# EAGLE board hideo (EAGLE 4.16)
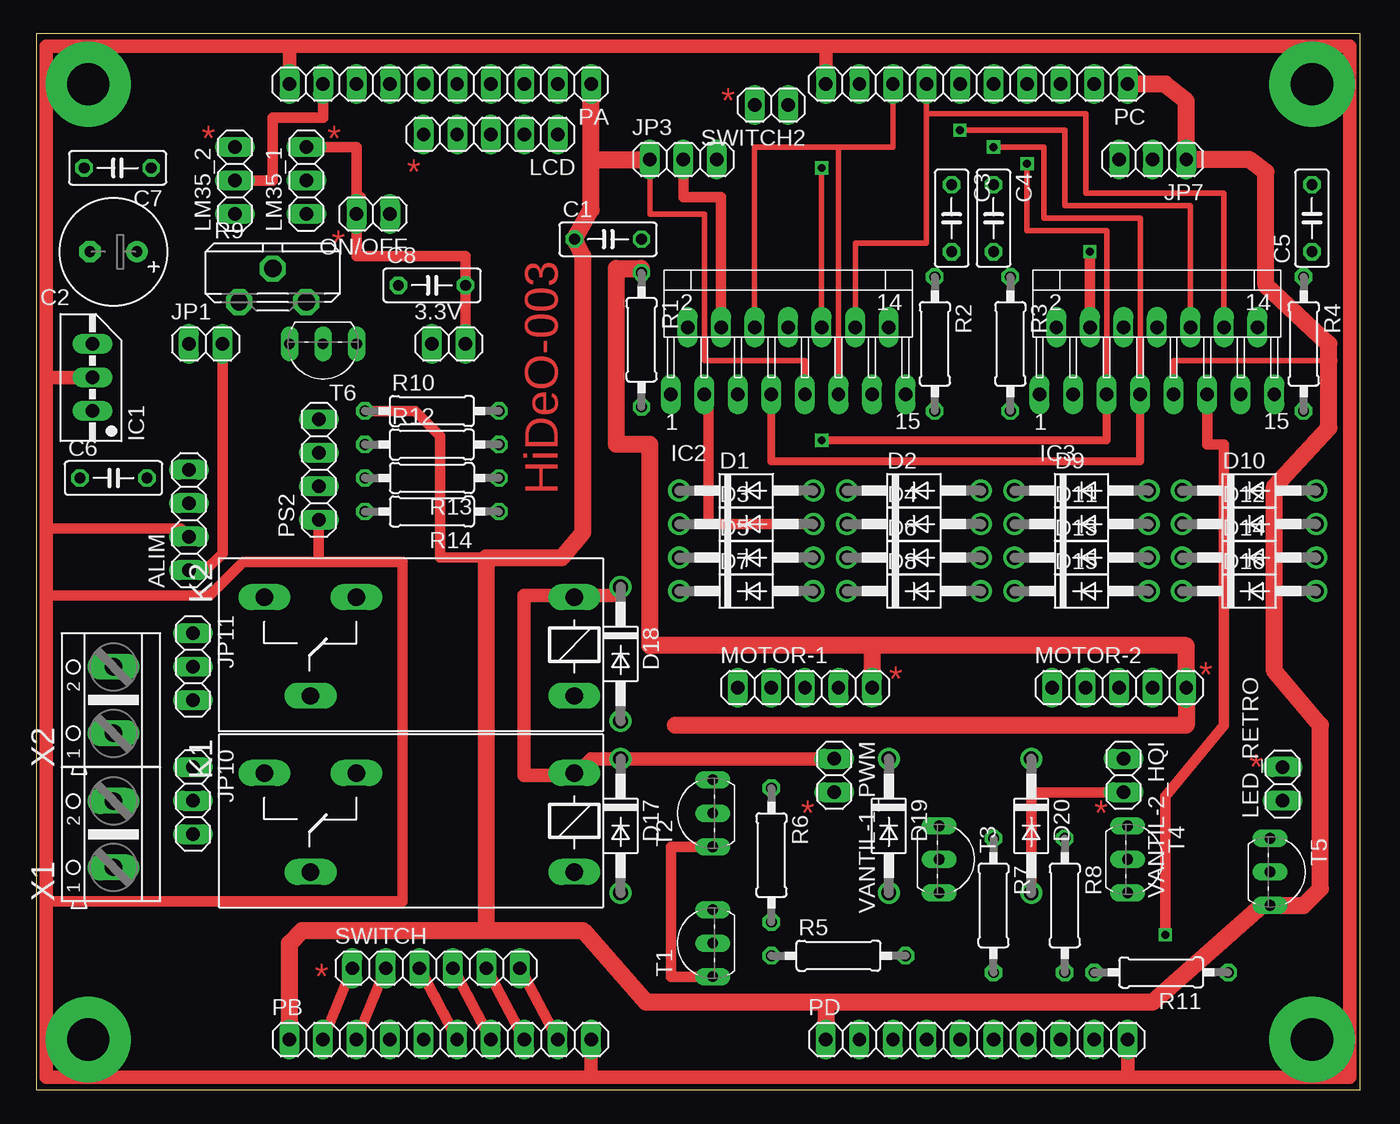
[diagram p0: board, top side]
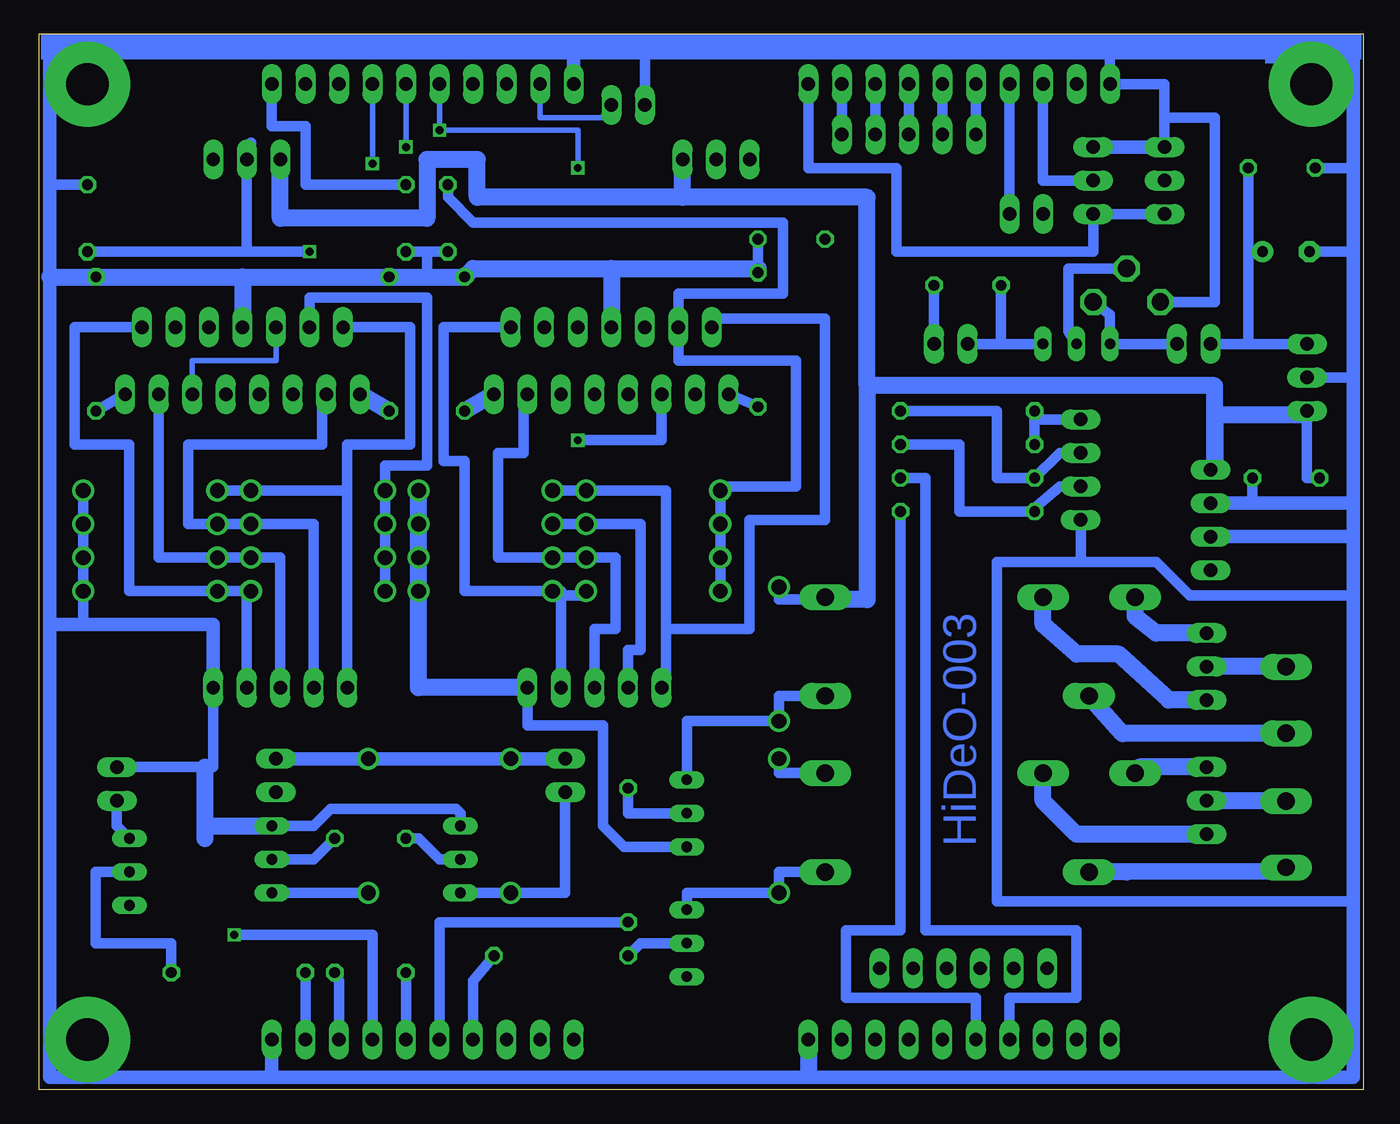
[diagram p1: board, bottom side, seen from below]

Size 100.32 x 80 mm. Coordinates in mm from the lower left corner, seen from the top.
Outline: 0,0 100.32,0 100.32,80 0,80 0,0
Copper layers (1*16): Top 0.035mm / dielectric 1.5mm / Bottom 0.035mm
Design rules "default": minimum track width 10mil, minimum drill 24mil, track to track 8mil, track to pad 8mil, pad to pad 8mil, via to via 8mil, smd to smd 8mil, copper to edge 40mil, drill to drill 8mil, minimum pad ring 10mil, minimum via ring 8mil, stop-mask expansion 4mil, vias tented up to drill 0mil, thermal gap 10mil

## Footprints (pad centres in the part's own frame; a part is rotated, then mirrored left to right if it is on the bottom)
1X02 = drill 1.016 long: 1 -1.27,0; 2 1.27,0
1X04 = drill 1.016 long: 1 -3.81,0; 2 -1.27,0; 3 1.27,0; 4 3.81,0
C050-025X075 = drill 0.813 octagon: 1 -2.54,0; 2 2.54,0
E3,5-8 = drill 0.813 pad 1.6 round: + -1.778,0 | drill 0.813 pad 1.6 octagon: - 1.778,0
DO41-10 = drill 1.118 round: A 5.08,0; C -5.08,0
78MXXS = drill 1.016 long: GND 0,-2.54; IN -2.54,-2.54; OUT 2.54,-2.54
MW-15 = drill 1.016 pad 1.27 long: 1 -8.89,-5.08; 2 -7.62,0; 3 -6.35,-5.08; 4 -5.08,0; 5 -3.81,-5.08; 6 -2.54,0; 7 -1.27,-5.08; 8 0,0; 9 1.27,-5.08; 10 2.54,0; 11 3.81,-5.08; 12 5.08,0; 13 6.35,-5.08; 14 7.62,0; 15 8.89,-5.08
1X03 = drill 1.016 long: 1 -2.54,0; 2 0,0; 3 2.54,0
G2R = drill 1.321 long: 1 -2.54,-3.683; 2 -2.54,3.81; O 13.97,-3.683; P 17.45,3.81; S 20.955,-3.683
1X05 = drill 1.016 long: 1 -5.08,0; 2 -2.54,0; 3 0,0; 4 2.54,0; 5 5.08,0
1X10 = drill 1.016 long: 1 -11.43,0; 2 -8.89,0; 3 -6.35,0; 4 -3.81,0; 5 -1.27,0; 6 1.27,0; 7 3.81,0; 8 6.35,0; 9 8.89,0; 10 11.43,0
0207/10 = drill 0.813 octagon: 1 -5.08,0; 2 5.08,0
ST10 = drill 1.321 octagon: A -2.54,-1.27; E 2.54,-1.27; S 0,1.27
1X06 = drill 1.016 long: 1 -6.35,0; 2 -3.81,0; 3 -1.27,0; 4 1.27,0; 5 3.81,0; 6 6.35,0
TO92-CBE = drill 0.813 long: B 0,0; C 2.54,0; E -2.54,0
AK500/2 = drill 1.321 long: 1 -2.515,0; 2 2.515,0

## Placement (x,y rotation side)
3.3V  [1X02]  31.27,56.51 0 top
ALIM  [1X04]  11.58,43.17 90 top
C1  [C050-025X075]  43.33,64.45 0 top
C2  [E3,5-8]  5.87,63.49 180 top
C3  [C050-025X075]  69.37,66.04 270 top
C4  [C050-025X075]  72.54,66.04 270 top
C5  [C050-025X075]  96.67,66.04 90 top
C6  [C050-025X075]  5.87,46.35 0 top
C7  [C050-025X075]  6.18,69.84 180 top
C8  [C050-025X075]  30,60.95 0 top
D1  1N4004  [DO41-10]  53.81,45.4 0 top
D2  1N4004  [DO41-10]  66.51,45.4 0 top
D3  1N4004  [DO41-10]  53.81,42.86 0 top
D4  1N4004  [DO41-10]  66.51,42.86 0 top
D5  1N4004  [DO41-10]  53.81,40.32 0 top
D6  1N4004  [DO41-10]  66.51,40.32 0 top
D7  1N4004  [DO41-10]  53.81,37.78 0 top
D8  1N4004  [DO41-10]  66.51,37.78 0 top
D9  1N4004  [DO41-10]  79.21,45.4 0 top
D10  1N4004  [DO41-10]  91.91,45.4 0 top
D11  1N4004  [DO41-10]  79.21,42.86 0 top
D12  1N4004  [DO41-10]  91.91,42.86 0 top
D13  1N4004  [DO41-10]  79.21,40.32 0 top
D14  1N4004  [DO41-10]  91.91,40.32 0 top
D15  1N4004  [DO41-10]  79.21,37.78 0 top
D16  1N4004  [DO41-10]  91.91,37.78 0 top
D17  1N4004  [DO41-10]  44.29,20 270 top
D18  1N4004  [DO41-10]  44.29,33.02 270 top
D19  1N4004  [DO41-10]  64.61,20 270 top
D20  1N4004  [DO41-10]  75.4,20 270 top
IC1  [78MXXS]  1.74,53.97 90 top
IC2  [MW-15]  56.99,57.78 0 top
IC3  [MW-15]  84.92,57.78 0 top
JP1  [1X02]  12.85,56.51 0 top
JP3  [1X03]  49.05,70.48 0 top
JP7  [1X03]  84.61,70.48 180 top
JP10  [1X03]  11.9,21.9 270 top
JP11  [1X03]  11.9,32.06 270 top
K1  G2R  [G2R]  38.25,20.32 180 top
K2  G2R  [G2R]  38.25,33.65 180 top
LCD  [1X05]  34.44,72.39 180 top
LED_RETRO  [1X02]  94.45,23.17 90 top
LM35_1  [1X03]  20.47,68.89 90 top
LM35_2  [1X03]  15.07,68.89 90 top
MOTOR-1  [1X05]  58.26,30.48 0 top
MOTOR-2  [1X05]  82.07,30.48 0 top
ON/OFF  [1X02]  25.55,66.35 180 top
PA  [1X10]  30.63,76.2 180 top
PB  [1X10]  30.63,3.81 0 top
PC  [1X10]  71.27,76.2 180 top
PD  [1X10]  71.27,3.81 0 top
PS2  [1X04]  21.43,46.98 90 top
R1  1  [0207/10]  45.87,56.83 270 top
R2  1  [0207/10]  68.1,56.51 270 top
R3  1  [0207/10]  73.81,56.51 270 top
R4  1  [0207/10]  96.04,56.51 270 top
R5  5K6  [0207/10]  60.8,10.15 0 top
R6  5K6  [0207/10]  55.72,17.78 270 top
R7  [0207/10]  72.54,13.96 270 top
R8  [0207/10]  77.94,13.96 270 top
R9  [ST10]  17.93,60.95 0 top
R10  10k  [0207/10]  30,51.43 0 top
R11  [0207/10]  85.24,8.88 180 top
R12  10k  [0207/10]  30,48.89 0 top
R13  150  [0207/10]  30,46.35 180 top
R14  150  [0207/10]  30,43.81 180 top
SWITCH  [1X06]  30.32,9.2 0 top
SWITCH2  [1X02]  55.72,74.61 180 top
T1  [TO92-CBE]  51.27,11.11 90 top
T2  [TO92-CBE]  51.27,20.95 90 top
T3  [TO92-CBE]  68.42,17.46 270 top
T4  [TO92-CBE]  82.7,17.46 270 top
T5  [TO92-CBE]  93.5,16.51 270 top
T6  [TO92-CBE]  21.74,56.51 180 top
VANTIL-1_PWM  [1X02]  60.48,23.81 270 top
VANTIL-2_HQI  [1X02]  82.39,23.81 270 top
X1  [AK500/2]  5.87,19.36 90 top
X2  [AK500/2]  5.87,29.52 90 top

## Library data of the parts
3.3V ALIM JP1 JP3 JP7 JP10 JP11 LCD LED_RETRO LM35_1 LM35_2 MOTOR-1 MOTOR-2 ON/OFF PA PB PC PD PS2 SWITCH SWITCH2 VANTIL-1_PWM VANTIL-2_HQI = pinhead
C1-C8 R1-R8 R10-R14 = rcl
D1-D20 = diode
IC1 = v-reg
IC2 IC3 = sgs-thom
K1 K2 = relay
R9 = pot
T1-T6 = transistor
X1 X2 = con-ptr500

## Nets
+5V: ALIM.1 JP1.2 R9.E T6.C
GND: 3.3V.2 ALIM.2 ALIM.3 C1.2 C2.- C3.2 C4.2 C5.2 C6.2 C7.2 C8.2 D2.A D4.A D6.A D8.A D10.A D12.A D14.A D16.A IC1.GND IC2.8 IC3.8 LED_RETRO.2 LM35_1.3 LM35_2.3 MOTOR-1.5 MOTOR-2.5 ON/OFF.2 PA.10 PB.10 PC.10 PD.10 PS2.1 R1.1 R2.1 R3.1 R4.1 R9.A SWITCH2.2 T1.E T2.E T3.E T4.E
N$1: C2.+ C7.1 IC1.OUT JP1.1
N$2: D17.A K1.2 T1.C
N$3: R5.1 T1.B
N$6: D1.A D2.C IC2.2 MOTOR-1.1
N$7: D3.A D4.C IC2.3 MOTOR-1.2
N$8: D5.A D6.C IC2.13 MOTOR-1.3
N$9: D7.A D8.C IC2.14 MOTOR-1.4
N$10: JP10.3 K1.O
N$11: JP10.1 K1.S
N$12: IC2.1 R1.2
N$13: IC2.15 R2.2
N$15: JP10.2 X1.2
N$17: R9.S T6.B
N$18: 3.3V.1 C8.1 T6.E
N$20: C3.1 D1.C D3.C D5.C D7.C IC2.4 JP3.2
N$21: K1.P X1.1
N$22: D18.A K2.2 T2.C
N$23: R6.1 T2.B
N$24: D9.A D10.C IC3.2 MOTOR-2.1
N$25: D11.A D12.C IC3.3 MOTOR-2.2
N$26: D13.A D14.C IC3.13 MOTOR-2.3
N$27: D15.A D16.C IC3.14 MOTOR-2.4
N$28: IC3.1 R3.2
N$29: IC3.15 R4.2
N$30: R11.1 T5.B
N$31: PS2.3 R10.2 R13.2
N$32: PS2.2 R12.2 R14.2
N$35: C5.1 D9.C D11.C D13.C D15.C IC3.4 JP7.2
N$36: JP11.3 K2.O
N$37: JP11.1 K2.S
N$38: JP11.2 X2.2
N$39: K2.P X2.1
N$40: LED_RETRO.1 T5.E
N$43: R7.1 T3.B
N$44: D19.A T3.C VANTIL-1_PWM.2
N$48: R8.1 T4.B
N$49: D20.A T4.C VANTIL-2_HQI.2
PA0: LCD.1 PA.2
PA1: LCD.2 PA.3
PA2: LCD.3 PA.4
PA3: LCD.4 PA.5
PA4: LCD.5 PA.6
PA5: ON/OFF.1 PA.7
PA6: LM35_1.2 PA.8
PA7: LM35_2.2 PA.9
PB0: PB.2 SWITCH.1
PB1: PB.3 SWITCH.2
PB2: PB.4 R13.1
PB3: PB.5 R14.1
PB4: PB.6 SWITCH.3
PB5: PB.7 SWITCH.4
PB6: PB.8 SWITCH.5
PB7: PB.9 SWITCH.6
PC2: IC2.5 IC3.5 PC.4
PC3: IC2.7 IC3.7 PC.5
PC4: IC2.10 IC3.10 PC.6
PC5: IC2.12 IC3.12 PC.7
PC6: IC2.6 IC2.11 PC.8
PC7: PC.9 SWITCH2.1
PD2: PD.4 R5.2
PD3: PD.5 R6.2
PD4: PD.6 R7.2
PD5: IC3.6 IC3.11 PD.7
PD6: PD.8 R8.2
PD7: PD.9 R11.2
RXD: PD.2
SCL: PC.2
SDA: PC.3
TXD: PD.3
VCC: C1.1 C4.1 IC2.9 IC3.9 JP3.1 JP7.1 LM35_1.1 LM35_2.1 PA.1 PB.1 PC.1 PD.1 PS2.4 R10.1 R12.1 T5.C
VDD: ALIM.4 C6.1 D17.C D18.C D19.C D20.C IC1.IN JP3.3 JP7.3 K1.1 K2.1 VANTIL-1_PWM.1 VANTIL-2_HQI.1

## Tracks (layer width: path | path; a pad name or v marks a point on that pad's centre or on a via)
+5V
  Top 0.813: 13.8,56.51 JP1.2 14.12,40.63 12.85,39.36 ALIM.1
  Bottom 0.813: R9.E 19.2,58.73 T6.C JP1.2 14.12,57.14
GND
  Top 0.254: T2.E 51.59,18.41
  Top 0.813: ON/OFF.2 24.28,71.43 LM35_1.3 | ON/OFF.2 24.6,67.62 | ON/OFF.2 24.28,63.18 32.54,63.18 3.3V.2 | T1.E 48.1,8.57 48.1,18.41 T2.E | 0.79,14.28 27.77,14.28 27.77,40 21.43,40 | 0.79,42.54 10.95,42.54 ALIM.2 | 0.79,37.46 13.17,37.46 15.71,40 21.43,40 | 21.43,40 PS2.1
  Top 1.016: 19.2,79.05 99.53,79.05 99.53,0.95 82.7,0.95 | 19.2,79.05 0.79,79.05 0.79,53.97 | 0.79,53.97 0.79,42.54 0.79,37.46 0.79,14.28 0.79,0.95 42.06,0.95 | 42.06,0.95 PB.10 | 42.06,0.95 82.7,0.95 | 82.7,0.95 PD.10 | PC.10 59.84,79.05 | 19.2,79.05 PA.10 | 0.79,53.97 IC1.GND
  Top 1.27: 63.33,33.65 87.15,33.65 MOTOR-2.5 87.15,27.62 48.41,27.62 | 63.33,33.65 MOTOR-1.5 | 63.33,33.65 46.51,33.65 46.51,48.89 43.97,48.89 43.97,62.22 45.87,62.22 R1.1
  Bottom 0.813: 96.99,42.54 D14.A D16.A 96.99,35.24 87.15,35.24 | 96.99,45.08 97.31,45.71 | 96.99,45.08 D10.A | 96.99,42.54 D12.A | 96.99,42.54 96.99,45.08 | 19.2,79.05 PA.10 15.07,76.2 LM35_2.3 15.07,73.66 11.27,73.66 11.27,59.68 R9.A | LED_RETRO.2 87.78,24.44 87.15,24.44 MOTOR-2.5 | 8.41,44.45 C6.2 | IC1.GND 0.79,53.97 | 0.79,69.84 C7.2 | 0.79,63.49 C2.- | C1.2 R1.1 45.87,62.22 | 70.95,63.49 C3.2 | 70.95,63.49 C4.2 | 70.95,61.59 70.95,63.49 | 99.53,68.58 C5.2 | 0.79,14.28 27.77,14.28 27.77,40 21.43,40 | MOTOR-1.5 63.33,27.62 57.62,27.62 57.62,20 56.03,18.41 T2.E | T3.E 68.42,20.95 68.73,21.27 78.26,21.27 79.53,20 T4.E | 0.79,37.46 13.17,37.46 15.71,40 21.43,40 | 21.43,40 21.43,42.54 | 3.3V.2 C8.2 | 54.44,79.05 SWITCH2.2
  Bottom 1.016: 59.84,79.05 99.53,79.05 99.53,68.58 99.53,61.59 99.53,35.24 | 59.84,79.05 54.44,79.05 19.2,79.05 0.79,79.05 0.79,69.84 0.79,63.49 0.79,53.97 0.79,44.45 | 99.53,35.24 99.53,0.95 82.7,0.95 | 42.06,0.95 0.79,0.95 0.79,14.28 0.79,37.46 0.79,41.9 | 42.06,0.95 82.7,0.95 | 0.79,41.9 0.79,44.45 | LM35_2.3 LM35_1.3 | 59.84,79.05 PC.10 | PD.10 82.7,0.95 | MOTOR-2.5 87.15,35.24 99.53,35.24 | 42.06,1.27 42.06,0.95 | ALIM.2 0.79,41.9 | 0.79,44.45 8.41,44.45 ALIM.3
  Bottom 1.27: MOTOR-1.5 71.59,30.48 D8.A D6.A D4.A D2.A | 84.92,61.59 IC3.8 | 84.92,61.59 R4.1 99.53,61.59 | 84.92,61.59 R3.1 70.95,61.59 R2.1 67.46,62.22 56.99,62.22 | 56.99,62.22 IC2.8 | 56.99,62.22 45.87,62.22 | 87.78,20 T4.E | 87.78,24.44 87.78,20 | 87.78,20 87.78,19.05 | PB.10 42.06,1.27
N$1
  Bottom 0.813: IC1.OUT 8.72,56.51 | 8.72,56.51 8.72,63.49 | 8.72,63.49 C7.1 | 8.72,63.49 C2.+ | 8.72,56.51 JP1.1
N$2
  Bottom 0.813: K1.2 44.29,16.51 D17.A 51.27,14.92 T1.C
N$3
  Bottom 0.813: R5.1 54.76,11.11 T1.B
N$4  (via drill 3.2 pad 6.45)
  other vias: 96.67,76.2
N$5  (via drill 3.2 pad 6.45)
  other vias: 96.67,3.81
N$6
  Bottom 0.813: MOTOR-1.1 52.86,30.79 52.86,34.92 | 52.86,34.92 46.51,34.92 46.51,43.17 40.79,43.17 40.79,58.41 49.68,58.41 49.68,58.1 IC2.2 | 52.86,34.92 52.86,45.4 D1.A | D1.A 59.21,45.4 | D1.A D2.C
N$7
  Top 0.813: IC2.3 50.95,52.7 50.95,42.86 D3.A
  Bottom 0.813: MOTOR-1.2 55.71,33.33 54.76,33.33 54.76,42.86 D3.A D4.C 61.43,43.17
N$8
  Bottom 0.813: D5.A 56.67,40.32 56.67,34.92 58.25,34.92 MOTOR-1.3 | D5.A D6.C | D5.A 65.56,40.32 65.56,48.25 63.65,48.25 63.65,53.02 IC2.13
N$9
  Bottom 0.813: MOTOR-1.4 60.79,37.78 D8.C | D8.C 61.11,37.78 61.11,37.46 59.21,37.46 59.21,37.78 D7.A | D8.C 68.1,37.78 68.1,47.62 69.68,47.62 69.68,57.78 IC2.14
N$10
  Bottom 1.27: K1.O 24.28,21.9 21.74,19.36 JP10.3
N$11
  Bottom 1.27: K1.S 16.98,24.44 JP10.1
N$12
  Bottom 0.813: R1.2 IC2.1
N$13
  Bottom 1.27: IC2.15 R2.2
N$14  (via drill 3.2 pad 6.45)
  other vias: 3.96,3.81
N$15
  Bottom 1.27: X1.2 5.87,21.9 JP10.2
N$16  (via drill 3.2 pad 6.45)
  other vias: 3.96,76.2
N$17
  Bottom 0.813: T6.B 22.38,57.46 22.38,62.22 R9.S
N$18
  Bottom 0.813: T6.E 27.46,56.51 | 27.46,56.51 3.3V.1 | 27.46,56.51 C8.1
N$20
  Top 0.813: JP3.2 49.05,67.62 51.9,67.62 IC2.4
  Bottom 0.813: D7.C D5.C D3.C D1.C 48.73,45.71 43.01,45.71 43.01,55.24 51.9,55.24 IC2.4 51.9,60.32 43.97,60.32 43.97,65.72 67.46,65.72 69.37,67.62 C3.1
N$21
  Bottom 1.27: K1.P 17.93,16.51 5.89,16.53 X1.1
N$22
  Bottom 0.813: K2.2 44.29,29.84 D18.A 51.27,27.94 T2.C
N$23
  Bottom 0.813: 50.95,20.95 T2.B 55.71,20.95 R6.1
N$24
  Bottom 0.813: MOTOR-2.1 76.99,45.4 | 76.99,45.4 D9.A D10.C | 76.99,45.4 76.99,48.89 72.23,48.89 72.23,57.78 IC3.2
N$25
  Bottom 0.813: MOTOR-2.2 79.53,42.86 D11.A D12.C | D12.C 86.83,43.17 | IC3.3 78.89,52.7 78.89,48.89 89.05,48.89 89.05,42.86 D12.C
N$26
  Bottom 0.813: D14.C D13.A 82.07,40.32 MOTOR-2.3 | D14.C 86.83,40.63 | D14.C 91.28,40.32 IC3.13
N$27
  Bottom 0.813: 84.29,30.48 MOTOR-2.4 84.61,37.78 D15.A D16.C 93.5,37.78 93.5,48.89 97.62,48.89 97.62,57.78 IC3.14
N$28
  Bottom 1.27: R3.2 IC3.1
N$29
  Bottom 0.813: IC3.15 R4.2
N$30
  Bottom 0.813: R11.1 90.32,11.11 96.04,11.11 96.04,16.51 T5.B
N$31
  Bottom 0.813: PS2.3 23.01,48.25 R13.2 27.77,46.35 27.77,51.43 R10.2
N$32
  Bottom 0.813: 25.23,43.81 23.01,45.71 PS2.2 | R12.2 30.63,48.89 30.63,43.81 25.23,43.81 | R14.2 25.23,43.81
N$35  (via drill 0.6)
  Top 0.813: IC3.4 v79.84,63.49
  Bottom 0.813: D15.C D13.C D11.C D9.C 74.13,47.3 70.95,47.3 70.95,60 79.84,60 IC3.4 | 84.61,63.49 C5.1 | JP7.2 84.29,71.75 84.61,71.43 84.61,63.49 | v79.84,63.49 84.61,63.49
N$36
  Bottom 1.27: JP11.3 14.76,29.52 18.57,33.02 21.74,33.02 24.28,35.24 K2.O
N$37
  Bottom 1.27: K2.S 17.3,35.87 15.71,34.6 JP11.1
N$38
  Bottom 1.27: X2.2 5.55,32.06 JP11.2
N$39
  Bottom 1.27: X2.1 11.29,27.01 18.25,26.98 K2.P
N$40
  Bottom 0.813: LED_RETRO.1 94.45,20 T5.E
N$43
  Bottom 0.813: R7.1 71.59,19.05 70,17.46 T3.B
N$44
  Bottom 0.813: VANTIL-1_PWM.2 60.48,14.92 D19.A T3.C
N$48
  Bottom 0.813: T4.B 79.53,17.46 R8.1
N$49
  Top 0.813: VANTIL-2_HQI.2 75.4,22.54 D20.A 75.4,14.6
  Bottom 0.813: T4.C D20.A 75.08,14.92
PA0
  Bottom 0.813: 39.21,75.88 PA.2 LCD.1
PA1
  Bottom 0.813: LCD.2 PA.3
PA2
  Bottom 0.813: LCD.3 PA.4
PA3
  Bottom 0.813: 31.9,73.34 LCD.4 PA.5
PA4
  Bottom 0.813: LCD.5 PA.6
PA5
  Bottom 0.813: ON/OFF.1 PA.7
PA6
  Bottom 0.813: LM35_1.2 24.28,68.89 PA.8
PA7
  Top 0.813: LM35_2.2 17.93,68.89 17.93,73.66 21.74,73.66 PA.9
PB0
  Top 0.813: PB.2 SWITCH.1
PB1
  Top 0.813: PB.3 SWITCH.2
PB2
  Bottom 0.813: PB.4 26.82,6.98 21.74,6.98 21.74,12.06 33.17,12.06 33.17,46.35 R13.1
PB3
  Bottom 0.813: PB.5 29.36,6.98 39.21,6.98 39.21,12.06 35.08,12.06 R14.1
PB4
  Top 0.813: PB.6 SWITCH.3
PB5
  Top 0.813: PB.7 SWITCH.4
PB6
  Top 0.813: PB.8 SWITCH.5
PB7
  Top 0.813: PB.9 SWITCH.6
PC2  (via drill 0.6)
  Top 0.406: IC3.5 81.12,65.08 75.08,65.08 v75.08,70.16
  Top 0.61: IC3.5 81.12,49.21 v59.53,49.21
  Bottom 0.406: v75.08,70.16 PC.4
  Bottom 0.813: v59.53,49.21 53.18,49.21 IC2.5
PC3  (via drill 0.6)
  Top 0.406: IC3.7 83.65,66.04 76.35,66.04 76.35,71.43 v72.54,71.43
  Top 0.61: IC3.7 83.65,47.62 55.71,47.62 IC2.7
  Bottom 0.406: v72.54,71.43 PC.5
PC4  (via drill 0.6)
  Top 0.406: IC2.10 v59.53,69.84 | IC3.10 87.46,66.99 77.94,66.99 77.94,72.7 v70,72.7
  Bottom 0.406: IC2.10 59.84,57.78 59.84,58.1 59.53,58.1 | PC.6 v70,72.7 59.53,72.7 v59.53,69.84
PC5
  Top 0.406: IC2.12 62.07,64.13 67.46,64.13 67.46,73.97 | 67.46,73.97 PC.7 | IC3.12 90.01,67.94 79.53,67.94 79.53,73.97 67.46,73.97
PC6
  Top 0.406: 60.79,71.43 IC2.11 | IC2.6 54.44,71.43 60.79,71.43 | 60.79,71.43 64.92,71.43 PC.8
PC7
  Bottom 0.406: SWITCH2.1 56.99,73.66 62.38,73.66 PC.9
PD2
  Bottom 0.813: R5.2 67.46,8.25 PD.4
PD3
  Bottom 0.813: PD.5 70,12.69 R6.2
PD4
  Bottom 0.813: PD.6 R7.2
PD5  (via drill 0.6)
  Top 0.813: IC3.11 88.73,48.89 90.01,48.89 90.01,27.62 85.56,22.22 v85.56,11.74
  Bottom 0.406: IC3.11 88.73,55.24 82.39,55.24 IC3.6
  Bottom 0.813: v85.56,11.74 75.08,11.74 PD.7
PD6
  Bottom 0.813: PD.8 77.62,8.25 R8.2
PD7
  Bottom 0.813: PD.9 R11.2
VCC
  Top 0.406: IC2.9 58.25,55.24 50.64,55.24 50.64,66.35 46.51,66.35 JP3.1 | IC3.9 86.2,55.24 97.94,55.24
  Top 0.813: R10.1 28.73,51.43 30.63,49.52 30.63,40.32 34.12,40.32
  Top 1.016: JP7.1 87.15,71.43
  Top 1.27: 19.2,5.39 PB.1 19.2,11.11 20.16,12.06 34.12,12.06 | 59.84,6.66 PD.1 | 42.06,70.48 42.06,66.67 C1.1 41.43,63.18 41.43,42.22 39.84,40.32 34.12,40.32 34.12,12.06 | 42.06,70.48 PA.1 | 59.84,6.66 84.61,6.66 92.86,13.96 T5.C 96.04,13.96 97.31,15.23 97.31,27.62 93.81,31.75 93.81,45.71 97.94,50.16 97.94,55.24 97.94,56.51 93.18,60.95 93.18,69.53 91.91,70.48 JP7.1 87.15,74.93 85.56,76.2 PC.1 | 42.06,70.48 JP3.1 | 34.12,12.06 41.43,12.06 46.19,6.66 59.84,6.66
  Bottom 0.813: PA.1 42.06,69.84 35.39,69.84 35.39,63.49 20.47,63.49 LM35_1.1 LM35_2.1 | C4.1 80.16,68.58 80.16,73.02 82.7,73.02 PC.1 | 24.92,50.79 R12.1 | R10.1 24.92,50.79 | 24.92,50.79 PS2.4
VDD
  Top 1.016: D17.C 43.97,25.08 | D17.C VANTIL-1_PWM.1 | 40.79,23.81 K1.1 | D17.C 42.06,25.08 40.79,23.81 | 40.79,23.81 36.98,23.81 36.98,37.46 40.79,37.46 K2.1 | 41.11,37.46 43.65,37.46 D18.C
  Bottom 0.813: D18.C 44.29,37.14 40.47,37.14 | K1.1 44.29,24 D17.C | C6.1 4.28,46.35 IC1.IN 4.28,51.11
  Bottom 1.016: VANTIL-1_PWM.1 D19.C D20.C | D20.C 75.72,25.08 | D20.C VANTIL-2_HQI.1
  Bottom 1.27: 11.27,46.98 ALIM.4 | 11.27,46.98 11.27,53.34 37.62,53.34 | 37.62,53.34 37.62,37.14 40.47,37.14 40.79,37.14 K2.1 | 11.27,46.98 11.27,51.11 4.28,51.11 | 37.62,53.34 37.62,67.62 51.59,67.62 | 51.59,67.62 JP3.3 | 51.59,67.62 67.15,67.62 67.15,70.48 70.95,70.48 70.95,66.04 82.07,66.04 JP7.3
(copper drawn outside any net)
  shapes: Bottom area x2

## Text on the board
Top: * | * | * | * | * | HiDeO-003 | * | * | * | * | * | *
Bottom: HiDeO-003